# Altium PCB audio amplifier.PcbDoc
Units mil, origin at the board's own origin, x right, y up, seen from the top; angles counter-clockwise.
Board outline 3010.03 x 3155.03 mil, 2 copper layers (Top Layer, Bottom Layer); 26 components, 19 nets, 76 pads, 14 vias.
Unrouted connection lines stored in the file: 16.
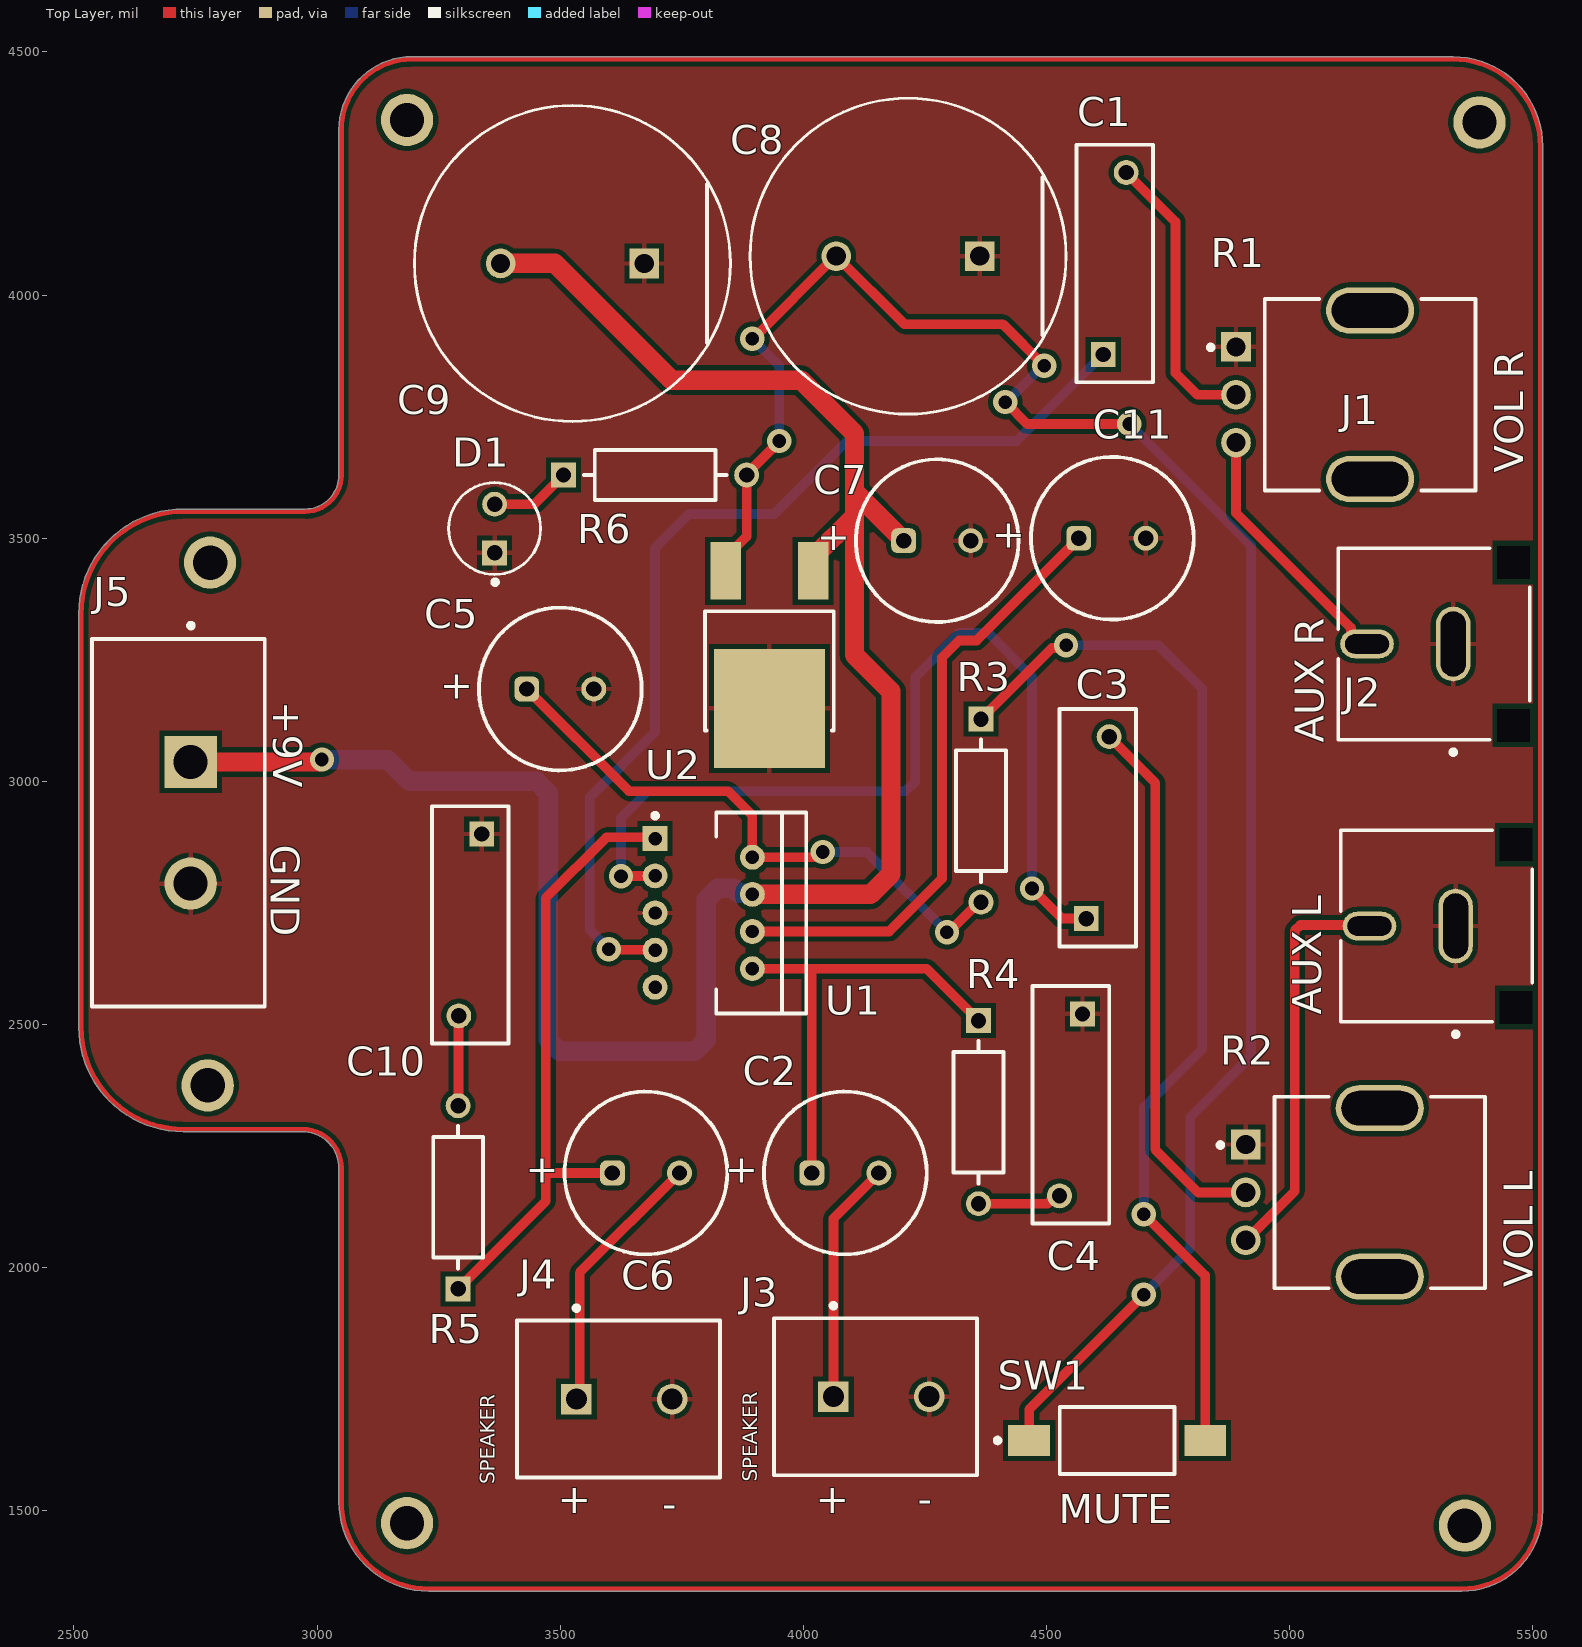
[diagram p0: Top Layer view]
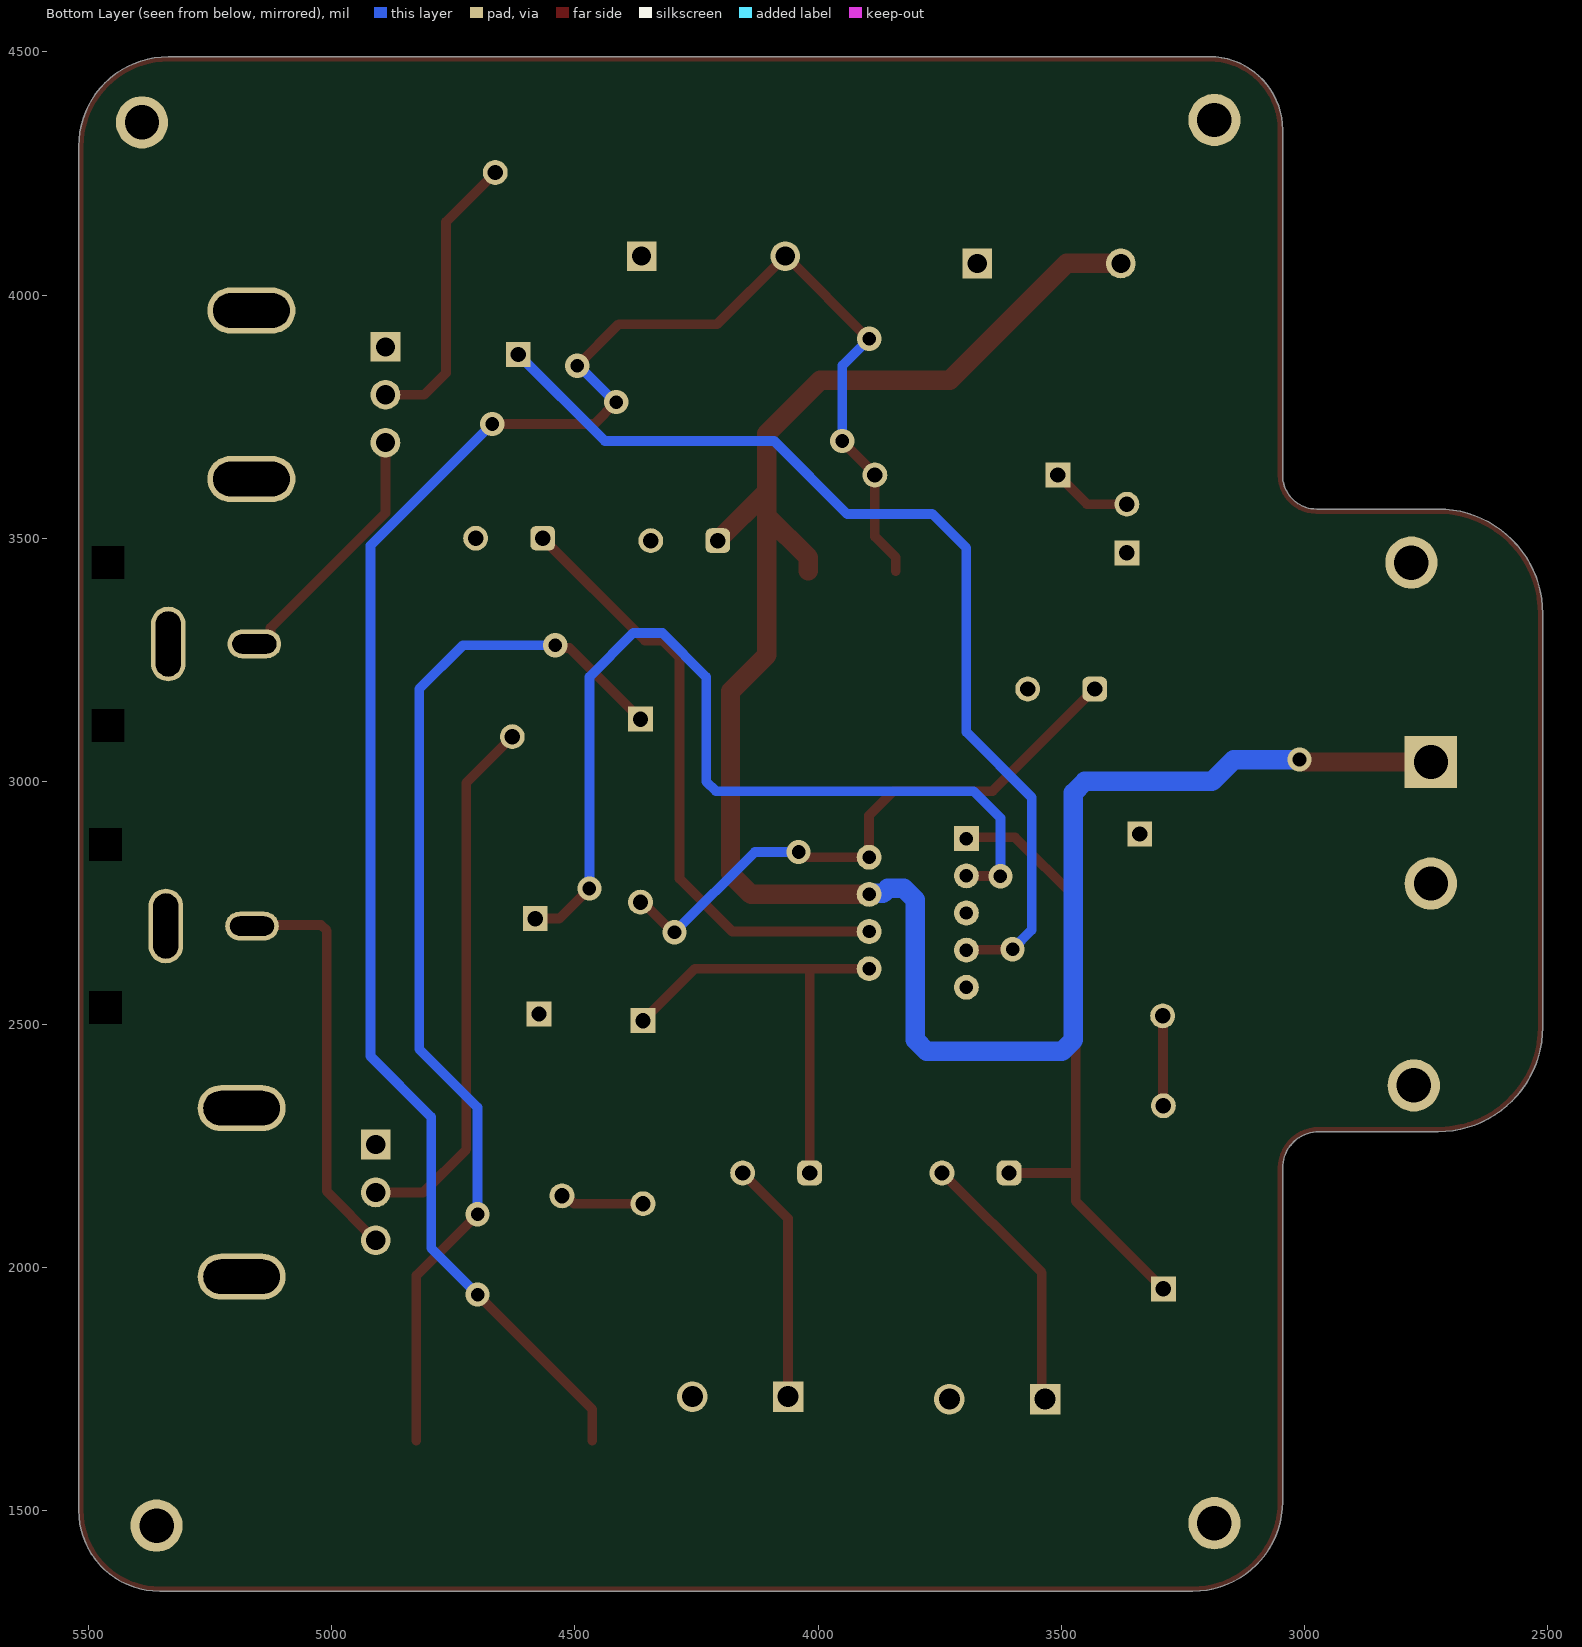
[diagram p1: Bottom Layer view, seen from below]
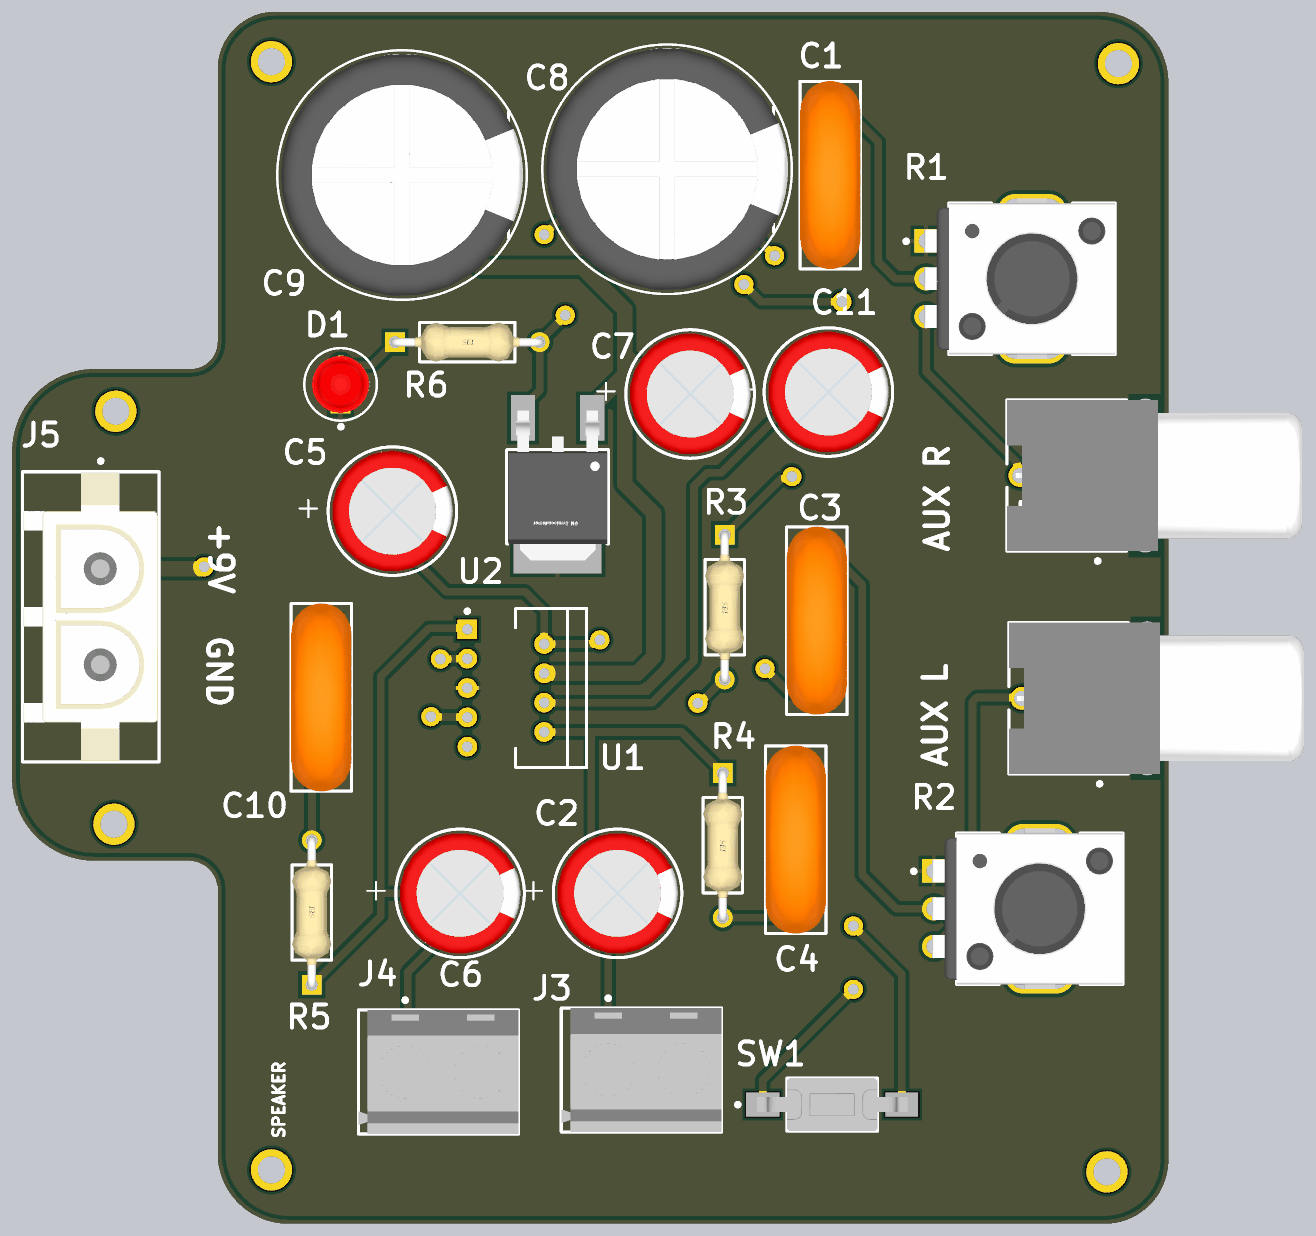
[diagram p2: 3D render of the assembled board from above, using the file's embedded part models]

## Layer stack, top to bottom
Top Solder: solder mask 0.4, Solder Resist, Dk 3.5
Top Layer: signal copper 1.4
Dielectric 1: dielectric 12.6, FR-4, Dk 4.8
Bottom Layer: signal copper 1.4
Bottom Solder: solder mask 0.4, Solder Resist, Dk 3.5

## Board outline
2725,2279.99 2970,2279.99 cw(c2970,2205) 3044.99,2205 3044.99,1519.16 ccw(c3229.16,1519.16) 3229.16,1334.98 5353.76,1334.98 ccw(c5353.76,1501.24) 5520.02,1501.24 5520.02,4305.84 ccw(c5335.84,4305.84) 5335.84,4490.02 3195,4490.02 ccw(c3195,4340) 3044.99,4340 3044.99,3630 cw(c2975,3630) 2975,3560.01 2725,3560.01 ccw(c2725,3345) 2509.99,3345 2509.99,2495 ccw(c2725,2495)

## Design rules (kind name [scope] priority, off if disabled: settings)
Clearance [All] p1: gap=10 ignorepadtopadclearanceinfootprint=FALSE
PolygonConnect [All] p1: connectstyle=Relief reliefconductorwidth=10 reliefentries=4 polygonreliefangle="90 Angle" airgapwidth=10
RoutingVias [All] p1: holewidth=28 width=50 viastyle="Through Hole" minholewidth=28 minwidth=50 maxholewidth=28 maxwidth=50
SolderMaskExpansion [All] p1: expansion=4 istentingtop=FALSE
SupplyNets "Schematic Supply Nets_1" [InNet('VCC')] p1: voltage=0.000
SupplyNets "Schematic Supply Nets" [InNet('GND')] p2: voltage=0.000
Width [All] p1: maxlimit=40 minlimit=10 preferedwidth=20 minimp=50.000000 maximp=50.000000 favimp=50.000000
30 further rules are at their usual default settings.

## Components (designator, comment, footprint, x,y, rotation, side; value= is the part's Value field where it differs from the comment)
C1 "0.1nF" FP-562R5GAS10-MFG 4640,4065 r90 top
C2 "100uF" WCAP-ATLL_D8H11.5 4086.1,2195 r180 top
C3 "0.1nF" FP-562R5GAS10-MFG 4605,2905 r90 top
C4 "0.1nF" FP-562R5GAS10-MFG 4550,2335 r270 top
C5 "10uF" WCAP-ATLL_D8H11.5 3500,3190 r180 top
C6 "100uF" WCAP-ATLL_D8H11.5 3676.1,2195 r180 top
C7 "100uF" WCAP-ATLL_D8H11.5 4275,3495 r180 top
C8 "1uF" FP-RAD-TH-D_16_0_5-L_25_2-MFG 4215,4080 r180 top
C9 "1uF" FP-RAD-TH-D_16_0_5-L_25_2-MFG 3525,4065 r180 top
C10 "0.1nF" FP-562R5GAS10-MFG 3315,2705 r270 top
C11 "100uF" WCAP-ATLL_D8H11.5 4635,3500 r180 top
D1 "LTL-1CHEE" FP-LTL-1CHEE-MFG 3365,3520 r90 top
J1 "RCJ-041" CUI-RCJ-041_V 5335.98,3282.68 r90 top
J2 "RCJ-041" CUI-RCJ-041_V 5340.98,2702.68 r90 top
J3 "282836-2" TECO-282836-2_V 4160,1735 r0 top
J4 "282836-2" TECO-282836-2_V 3631.57,1730 r0 top
J5 "350428-1" FP-350428-1-MFG 2715,2915 r270 top
R1 "PTV09A-4225F-B103" FP-PTV09A-4-MFG 5165,3795 r270 top
R2 "PTV09A-4225F-B103" FP-PTV09A-4-MFG 5185,2155 r270 top
R3 "12k" FP-CF14-MFG 4365,2940 r270 top
R4 "12k" FP-CF14-MFG 4360,2320 r270 top
R5 "12k" FP-CF14-MFG 3290,2145 r90 top
R6 "1k" FP-CF14-MFG 3695,3630 r0 top
SW1 "FSMSM" TECO-FSMSM-2_V 4645,1645 r0 top
U1 "LM4755T" TA09A 3795,2729.57 r270 top
U2 "MC78M05BDTG" FP-369C-MFG 3930,3260 r180 top

## Footprints (in the part's own frame and the unit in brackets; to place one, negate y for a bottom-side part, rotate by r counter-clockwise, add the part's x,y. Pads: shape width x height; smd on the part's side, far side on the other; paste and mask are expansions set on the pad)
CUI-RCJ-041_V [mm] "Jack, 2-Leads, Body 19.5x10mm"
  oval 3.9x1.8 hole 1.3 slot 3.4 at 0 deg: 1(0,0)
  oval 1.5x2.8 hole 1 slot 2.3 at 90 deg: 2(0,4.5)
  round 0 hole 1.7 square unplated: MH1(-4.25,-3.15) MH2(4.25,-3.15)
  silkscreen extent -5.77,-4 5,6, body extent -5,-13.5 5,6, height 11.51
FP-369C-MFG [mm]
  rect 1.6x3 smd paste+0 mask+0: 1(-2.285,-4.39) 3(2.285,-4.39)
  rect 5.8x6.2 smd paste+0 mask+0: 4(0,2.79)
  silkscreen extent -3.36,-2.28 3.36,3.94, body extent -3.62,-5.99 3.62,5.99, height 0.25
FP-562R5GAS10-MFG [mm]
  rect 1.3x1.3 hole 0.8 paste-2539.97 mask+0: 1(-4.75,0.6)
  round 1.3 hole 0.8 paste-2539.97 mask+0: 2(4.75,-0.6)
  silkscreen extent -6.2,-2 6.2,2, body extent -6.3,-2.1 6.3,2.1, height 0.25
FP-350428-1-MFG [mm]
  rect 2.73x2.73 hole 1.78 paste-2539.97 mask+0: 1(-3.175,0.635)
  round 2.73 hole 1.78 paste-2539.97 mask+0: 2(3.175,0.635)
  silkscreen extent -10.42,-4.51 9.59,4.51, body extent -9.69,-4.61 9.69,4.61, height 0.25
FP-CF14-MFG [mm]
  rect 1.3x1.3 hole 0.8 paste-2539.97 mask+0: 1(-4.78,0)
  round 1.3 hole 0.8 paste-2539.97 mask+0: 2(4.78,0)
  silkscreen extent -3.73,-1.3 3.73,1.3, body extent -5.53,-1.4 5.53,1.4, height 0.25
FP-LTL-1CHEE-MFG [mm]
  rect 1.3x1.3 hole 0.8 paste-2539.97 mask+0: 1(-1.27,0)
  round 1.3 hole 0.8 paste-2539.97 mask+0: 2(1.27,0)
  silkscreen extent -2.92,-2.4 2.4,2.4, body extent -2.15,-2.15 2.15,2.15, height 0.25
FP-PTV09A-4-MFG [mm]
  rect 1.55x1.55 hole 1 paste-2539.97 mask+0: 1(-2.5,-7)
  round 1.55 hole 1 paste-2539.97 mask+0: 2(0,-7) 3(2.5,-7)
  rrect100% 2.4x4.6 hole 4 slot 1.8 at 0 deg paste-2539.97 mask+0: 4(-4.4,0) 5(4.4,0)
  silkscreen extent -5,-8.45 5,5.5, body extent -5.8,-7.88 5.8,5.6, height 0.25
FP-RAD-TH-D_16_0_5-L_25_2-MFG [mm]
  rect 1.55x1.55 hole 1 paste-2539.97 mask+0: 1(-3.75,0)
  round 1.55 hole 1 paste-2539.97 mask+0: 2(3.75,0)
  silkscreen extent -8.25,-8.25 8.25,8.25, body extent -8.35,-8.35 8.35,8.35, height 0.25
TA09A [mm] "TO, Thru-Hole, Vertical, Heatsink Mounted; 9 Bent Staggered Leads; Pitch 0.97 mm"
  rect 1.3x1.3 hole 0.7: 1(-3.88,-2.54)
  round 1.3 hole 0.7: 2(-2.91,2.54) 3(-1.94,-2.54) 4(-0.97,2.54) 5(0,-2.54) 6(0.97,2.54) 7(1.94,-2.54) 8(2.91,2.54) 9(3.88,-2.54)
  silkscreen extent -5.25,-2.66 5.25,5.35, body extent -5.25,0.65 5.25,5.35, height 20.9
TECO-282836-2_V [mm] "Female Header, Pitch 5mm, 1 x 2 Position, Height 10mm"
  rect 1.6x1.6 hole 1.1: 1(-2.5,0)
  round 1.6 hole 1.1: 2(2.5,0)
  silkscreen extent -5.6,-4.1 5,4.87, body extent -5.6,-4.1 5,4.1, height 10
TECO-FSMSM-2_V [mm] "SMD, 2-Leads, Body 6x3.5mm, Pitch 9.19mm"
  rect 2.2x1.6 smd: 1(-4.595,0)
  rect 2.18x1.6 smd: 2(4.595,0)
  silkscreen extent -6.37,-1.75 3,1.75, body extent -4.98,-1.75 4.98,1.75, height 4.4
WCAP-ATLL_D8H11.5 [mm] "Aluminum Electrolytic Capacitors, 8x11.5mm"
  rrect50% 1.3x1.3 hole 0.8: 1(1.75,0)
  round 1.3 hole 0.8: 2(-1.75,0)
  silkscreen extent -4.25,-4.25 4.25,4.25, body extent -3.99,-4 4,4, height 11.81

## Part data
C1 C3 C4 C10: library part CMP-02417-000061-1, "CAP CER 10000PF 1KV Z5U RADIAL", Capacitance=10nF, Case/Package=Radial, Dielectric=Z5U, Max Operating Temperature=105°C, Min Operating Temperature=-55°C, Package Quantity=250, Resistor Type=Ceramic, Tolerance=20%, Voltage=1kV, Application(s)="GENERAL PURPOSE", Construction=RADIAL, Contact Plating=Tin, Depth=4mm, Diameter=12.4mm, Dissipation Factor=2.5%, Height=0.25inch, Height - Seated (Max)=0.613inch, Lead Diameter=0.64mm, Lead Free="Lead Free", Lead Length=29mm, Lead Pitch=9.5mm, Lead/Base Style=Straight, Length=2inch, Mount="Through Hole", Packaging=Bulk, Radiation Hardening=No, RoHS Compliant=Yes, Series="Cera-Mite 562R", Termination=Radial, Voltage Rating=1kV, Voltage Rating (DC)=1kV, Weight=0.01lb, Width=4mm
C2 C5 C6 C7 C11: library part CMP-03913-53914461-1, "860160574013 WCAP-ATLL Aluminum Electrolytic Capacitors", Capacitance=100µF, Case/Package=Radial, Leakage Current=35µA, Max Operating Temperature=105°C, Min Operating Temperature=-55°C, Ripple Current=414mA, Tolerance=20%, Voltage Rating=35V, Diameter=8mm, Height=11.5mm, Lead Pitch=3.5mm, Length=11.5mm, Life (Hours)=7000hours, Material=Aluminium, NexarPartId=53914461, Pitch=3.5mm, REACH SVHC=Unknown, RoHS=Non-Compliant, Voltage Rating (DC)=35V
C8 C9: library part CMP-05427-001116-1, "Aluminum Electrolytic Capacitors (Radial Lead Type) 47uF ±20% 400V", Capacitance=47uF, Case/Package=Radial, Dielectric Material=Aluminium, Leakage Current=1.138mA, Max Operating Temperature=105°C, Min Operating Temperature=-25°C, Package Quantity=100, Ripple Current=1.18A, Tolerance=20%, Voltage=400V, Construction=RADIAL, Diameter=16mm, Dissipation Factor=0.24%, Height=25mm, Height - Seated (Max)=0.984inch, Lead Diameter=0.8mm, Lead Free="Lead Free", Lead Pitch=7.5mm, Length=25mm, Life (Hours)=10000Hour, Mount="Through Hole", Number of Pins=2, Packaging=Bulk, Radiation Hardening=No, REACH SVHC="No SVHC", Ripple Current (AC)=1.18A, RoHS Compliant=Yes, Series=EE, Termination=Radial, Voltage Rating=400V, Voltage Rating (DC)=400V
D1: library part CMP-22017-000040-1, "LED RED CLEAR T/H", Case/Package=T, Color=Red, Forward Current=30mA, Forward Voltage=2V, Max Operating Temperature=100°C, Max Power Dissipation=100mW, Min Operating Temperature=-55°C, Package Quantity=1000, Reverse Voltage=5V, Test Current=10mA, Depth=3.8mm, Diameter=3.1mm, Dominant Wavelength=625nm, Height=5.2mm, Illumination Color=Red, Lead Free="Lead Free", Length=3.8mm, Lens Color=Red, Lens Style=Dome, Lens Transparency=Clear, Luminous Intensity=19mcd, Mount="Through Hole", Number of Elements=1, Number of LEDs=1, Number of Pins=2, Packaging=Bulk, Power Dissipation=100mW, Radiation Hardening=No, RoHS Compliant=Yes, Series=-, Viewing Angle=45°, Wavelength=635nm, Width=3.8mm
J1 J2: library part CMP-1692-00002-1, "Female RCJ Jack, 2 Position, Height 11.724 mm, Tail Length 4 mm, RoHS, Bulk", Case\Package=Metal, Colour=Black, Current Rating="500 mA", Max Operating Temperature="85 degC", Min Operating Temperature="-55 degC", Package Quantity=400, Voltage Rating="40 V", ComponentLink1Description="Manufacturer URL", ComponentLink1URL=http://www.cui.com/, ComponentLink2Description=Datasheet, ComponentLink2URL=http://www.cui.com/product/resource/rcj-04x.pdf, Connector Type=HDMI, Contact Material=Copper, Contact Plating=Gold, DatasheetVersion="Rev. B, 02/2012", Gender=Female, Height="6.1 mm", Lead Pitch="0.5 mm", Length="16.2 mm", Mount="Surface Mount", PackageDescription="Female RCJ Jack, 2 Position, Height 11.724 mm, Tail Length 4 mm", PackageReference=RCJ-041, Packaging="Tape and Reel", Pins=19, REACH SVHC="No SVHC", RoHSCompliant=true
J3 J4: library part CMP-1684-00017-1, "Female Header, Pitch 5 mm, 1 x 2 Position, Height 10 mm, Tail Length 3.5 mm, Rohs, Bulk", Color=Green, Current=13.5A, Manufacturer="TE Connectivity", Package Description="Female Header, Pitch 5 mm, 1 x 2 Position, Height 10 mm, Tail Length 3.5 mm", Package Reference=THD, Standard Package=300, Voltage=300V, 3D Model=282836-2.pdf, Category=Connectors,Interconnects, Clamp Material - Plating=Brass-NickelPlated, Contact Material - Plating=Brass-TinPlated, Datasheet URL=http://www.te.com.cn/commerce/DocumentDelivery/DDEController?Action=showdoc&DocId=Catalog+Section%7F1308389_EUROSTYLE_TERMINAL_BLOCKS%7F0607%7Fpdf%7FEnglish%7FENG_CS_1308389_EUROSTYLE_TERMINAL_BLOCKS_0607.pdf%7F282836-2, Dynamic Catalog=BuchananSeries, Family=TerminalBlocks-WiretoBoard, Featured Product=EurostyleTerminalBlockConnectors, Features=Interlocking(Side), Housing Material=Polyamide(PA66),Nylon6/6, Manufacturer URL=http://www.te.com, Mating Orientation=HorizontalwithBoard, Mounting Type=ThroughHole, Number of Levels=1, Other Names="5ULV-02B / A98076", Packaging=Bulk, Pitch="0.197\"(5.00mm)", Positions Per Level=2, Product Training Modules=Wire-to-BoardEurostyleTerminalBlocks, RoHS Information=282836-2StatementofCompliance, Screw Material - Plating=Brass-NickelPlated, Screw Thread=M3, Series=Buchanan, Torque - Screw=0.68Nm(6Lb-In), Wire Gauge=16-30AWG, Wire Termination=Screw-RisingCageClamp
J5: library part CMP-03369-000080-1, "CONN HEADER VERT 2POS 6.35MM", Current Rating=12A, Manufacturer="TE Connectivity", Temperature="-40°C to +105°C", Temperature Range High=+105°C, Temperature Range Low=-40°C, Voltage Rating=600V, Automotive=No, Category=Conn, ComponentLink2Description=Datasheet, ComponentLink2URL=https://www.te.com/commerce/DocumentDelivery/DDEController?Action=showdoc&DocId=Customer+Drawing%7F350428%7FY2%7Fpdf%7FEnglish%7FENG_CD_350428_Y2.pdf%7F350428-1, Conn Gender=Male, Conn Orientation=Vertical, Contact Material=Gold,Nickel, Device Class L1=Connectors, Device Class L2="Headers and Wire Housings", Device Class L3=unset, Digikey Description="CONN HEADER VERT 2POS 6.35MM", Height=14.99mm, Lead Free=Yes, Manufacturer Part Number=350428-1, Mouser Description="Connector, Soft Shell; Universal MATE-N-LOK; 2; Nylon; Natural; 19 A; 600 VAC", Number Of Contacts=2, Number Of Rows=1, Octopart=https://octopart.com/350428-1-te+connectivity-46505355, Package=350428-1, Pitch=6.35mm, RoHS=TRUE, Standoff Height=0.63mm
R1 R2: library part CMP-07234-000052-1, "POT 10K OHM 1/20W CARBON LINEAR", Max Operating Temperature=50°C, Max Power Dissipation=50mW, Min Operating Temperature=-10°C, Package Quantity=100, Resistance=10kR, Resistance Tolerance=20%, Resistor Type=Carbon, Actuator Diameter=0.236inch, Actuator Length=0.984inch, Depth=12.5mm, Height=12.5mm, Hole Diameter=9.1mm, Length=11.4mm, Military Standard=Not, Mount="Through Hole", Number of Gangs=1, Number of Turns=1, Packaging=Bulk, Power Rating=50mW, Radiation Hardening=No, REACH SVHC="No SVHC", RoHS Compliant=Yes, Series="Pro Audio PTV09", Taper=Linear, Technology="CARBON FILM", Termination=PCB, Tolerance=20%, Type=Potentiometer
R3 R4 R5 R6: library part CMP-26528-000003-1, "RES 7.5K OHM 1/4W 5% AXIAL", Case/Package=Axial, Max Operating Temperature=155°C, Max Power Dissipation=250mW, Min Operating Temperature=-55°C, Resistance=7.5kR, Resistor Type="Carbon Film", Temperature Coefficient=-400ppm/°C, Tolerance=5%, Contact Plating=Tin, Diameter=2.3mm, Features="Flame Retardant Coating", Lead Free="Lead Free", Length=0.256inch, Mount="Through Hole", Number of Terminations=2, Packaging="Tape and Reel", Power Rating=250mW, Radiation Hardening=No, RoHS Compliant=Yes, Series=CF
SW1: library part CMP-2000-07511-1, "FSMSM Push Button Switch, 50 mA, -35 to 85 degC, 2-Pin SMD, RoHS, Bulk", Case\/Package=SMD/SMT, Contact Current Rating=50mA, Contact Resistance=100mOhm, Manufacturer="TE Connectivity", Max Operating Temperature=85degC, Max Voltage Rating (DC)=12V, Min Operating Temperature=-35degC, Operating Force=180gf, Package Description="2-Pin Surface Mount Device, Body 6 x 3.5 mm, Pitch 9.19 mm", Package Quantity=1000, Voltage Rating (DC)=24V, Actuator Length=1.07mm, Actuator Material=Polyamide, Contact Material=Brass, Contact Plating=Silver, Current Rating=50mA, Datasheet URL=http://www.te.com/commerce/DocumentDelivery/DDEController?Action=showdoc&DocId=Customer+Drawing%7F1437566-3%7FC2%7Fpdf%7FEnglish%7FENG_CD_1437566-3_C2_1437566_3_1_c.dwg.pdf%7F1437566-3, Datasheet Version="Rev. C2, 08/2014", Electrical Life=20000Cycles, ELV=Compliant, Illumination Type=Illuminated, Lead Free=LeadFree, Manufacturer URL=http://www.te.com/, Mechanical Life=20000Cycles, Mount=SurfaceMount, Mounting Technology=SurfaceMount, Orientation=Straight, Package Reference=FSMSM, Packaging=LoosePiece, REACH SVHC=Unknown, RoHSCompliant=true, Switch Travel=0.25mm, Termination=GullWing, Throw Configuration=SPST
U1: library part CMP-0057-00640-1, "Stereo 11W Audio Power Amplifier with Mute, 9-pin TO-220", Manufacturer="National Semiconductor", PackageTopMarking=NSUZXYTTE#*LM4755T, PowerWise=N, CompType="Audio IC", DatasheetVersion=May-2008, PackageDescription="TO-220, Molded, 9 Lead, Staggered", PackageReference=TA09A, PackageVersion="revC, Jul-1999", PinCount=9, RoHS=N
U2: library part CMP-07128-000029-1, "IC REG LINEAR 5V 500MA DPAK", Dropout Voltage=2V, Manufacturer="ON Semiconductor", Max Junction Temp=+125°C, Max Supply Voltage=35V, Min Supply Voltage=7V, Nominal Supply Current=3.2mA, Output Current=500mA, Output Voltage=5V, Package=369C, Temperature="-40°C to +125°C", Temperature Range Low=-40°C, Accuracy Percentage=4%, Automotive=No, Category=IC, ComponentLink2Description=Datasheet, ComponentLink2URL=https://www.onsemi.cn/PowerSolutions/document/MC78M00-D.PDF, Device Class L1="Integrated Circuits (ICs)", Device Class L2="Power Management ICs", Device Class L3="Voltage Regulators - Linear", Digikey Description="IC REG LINEAR 5V 500MA DPAK", Footprint Url=https://www.onsemi.com/pub/Collateral/369C.PDF, Height=2.51mm, Lead Free=Yes, Manufacturer Part Number=MC78M05BDTG, Mouser Description="Linear Voltage Regulators 5V 500mA Positive", Number Of Outputs=1, Octopart=https://octopart.com/mc78m05bdtg-on+semiconductor-1009693, Output Type=Fixed, RoHS=TRUE, Standoff Height=0mm, Temperature Range High=+125°C

## Free pads (board coordinates)
  round 107.48 hole 70.71: 8(2775,2375) 9(2780,3450) 10(3185,4360) 11(3185,1475) 12(5360,1470) 13(5390,4355)

## Via types
v1: diameter 50, hole 28, Top Layer to Bottom Layer, 14 vias

## Nets (pads, with @x,y where several pads share a name; then routed paths per layer and width w, separated by ;. In a path a pad name is that pad's centre, name@x,y a point inside that pad or via, vN(x,y) a via of type N, cw(c..) or ccw(c..) an arc to the next point about the centre after c; other vN are vias at no path point)
GND: C4.1 C5.2 C7.2 C8.1 C9.1 C10.1 C11.2 D1.1 J1.1 J2.1 J3.2 J4.2 J5.2 R1.1 R2.1 U1.5 U2.4
NetC1_1: C1.1 U1.7 | length 2078.8
  Top Layer w20: v1(3600,2655) 3600.91,2654.09 3694.09,2654.09 U1.7
  Bottom Layer w20: v1(3600,2655) 3560.78,2694.22 3560.78,2967.5 3695,3101.72 3695,3480 3765,3550 3940,3550 4090,3700 4438.39,3700 C1.1
NetC1_2: C1.2 R1.2 | length 597
  Top Layer w20: C1.2 4765,4150.63 4765,3840 4810,3795 R1.2
NetC2_1: C2.1 R4.1 U1.8 | length 930.2
  Top Layer w20: U1.8 4015,2615 ; C2.1 4017.2,2612.8 4015,2615 ; R4.1 4253.19,2615 4015,2615
NetC2_2: C2.2 J3.1 | length 498.7
  Top Layer w20: J3.1 4061.57,2101.57 C2.2
NetC3_1: C3.1 U1.3 | length 1928.1
  Top Layer w20: v1(3625,2805) 3625.47,2805.47 3694.53,2805.47 U1.3 ; v1(4470,2780) 4532.01,2717.99 C3.1
  Bottom Layer w20: v1(3625,2805) 3625,2925 3680,2980 4210,2980 4230,3000 4230,3215 4320,3305 4380,3305 4470,3215 v1(4470,2780)
NetC3_2: C3.2 R2.2 | length 1110.5
  Top Layer w20: C3.2 4723.15,2997.48 4723.15,2243.56 4811.72,2155 R2.2
NetC4_2: C4.2 R4.2 | length 173.1
  Top Layer w20: R4.2 4501.76,2131.81 4517.94,2147.99 C4.2
NetC5_1: C5.1 R3.2 U1.2 | length 1225.9
  Top Layer w20: C5.1 3641.1,2980 3845,2980 3895,2930 U1.2 4021.02,2844.13 4031.88,2855 v1(4040,2855) ; v1(4295,2690) 4299.09,2690 4360.91,2751.81 R3.2
  Bottom Layer w20: v1(4040,2855) 4130,2855 v1(4295,2690)
NetC6_1: C6.1 R5.1 U1.1 | length 1292.8
  Top Layer w20: R5.1 3470,2136.81 3470,2195 ; C6.1 3470,2195 ; U1.1 3692.32,2885 3595,2885 3470,2760 3470,2195
NetC6_2: C6.2 J4.1 | length 552.8
  Top Layer w20: J4.1 3540,1736.85 3540,1990 C6.2
NetC8_2: C8.2 R6.2 SW1.1 U2.3 | length 4076.2
  Top Layer w20: U2.3 3840.04,3460.39 3883.19,3503.54 R6.2 3883.19,3631.59 3950,3698.41 v1(3950,3700) ; v1(3895,3910) 3896.18,3910 4066.18,4080 C8.2 4207.36,3940 4410,3940 v1(4495,3855) ; v1(4415,3780) 4460,3735 v1(4670,3735) ; SW1.1 4464.09,1709.09 v1(4700,1945)
  Bottom Layer w20: v1(3895,3910) 3950,3855 v1(3950,3700) ; v1(4415,3780) 4417.5,3780 4492.5,3855 v1(4495,3855) ; v1(4670,3735) 4920,3485 4920,2435 4795.37,2310.37 4795.37,2040.37 v1(4700,1945)
NetC10_2: C10.2 R5.2 | length 185.4
  Top Layer w20: R5.2 3290.69,2333.88 3290.69,2517.3 C10.2
NetC11_1: C11.1 U1.6 | length 1272.6
  Top Layer w20: U1.6 4176.38,2691.38 4285,2800 4285,3255 4320,3290 4356.1,3290 C11.1
NetD1_2: D1.2 R6.1 | length 166.7
  Top Layer w20: D1.2 3446.81,3570 R6.1
NetJ1_2: J1.2 R1.3 | length 534.3
  Top Layer w20: R1.3 4889.41,3552.09 5125.76,3315.74 5125.76,3300.72 5143.8,3282.68 J1.2
NetJ2_2: J2.2 R2.3 | length 838
  Top Layer w20: R2.3 5010,2157.17 5010,2693.28 5021.72,2705 5161.5,2705 J2.2
NetR3_1: R3.1 SW1.2 | length 2202
  Top Layer w20: R3.1 4511.07,3274.26 4534.26,3274.26 v1(4540,3280) ; v1(4700,2110) 4825.91,1984.09 SW1.2
  Bottom Layer w20: v1(4540,3280) 4730,3280 4820,3190 4820,2450 4700,2330 v1(4700,2110)
VCC: C7.1 C9.2 J5.1 U1.4 U2.1 | length 4417.7
  Top Layer w40: J5.1 3002.29,3040 3007.29,3045 v1(3010,3045) ; C9.2 3489.03,4065 3729.03,3825 3995,3825 4105,3715 4105,3596.1 ; U1.4 4137.76,2767.76 4180,2810 4180,3185 4105,3260 4105,3545 ; U2.1 4019.96,3460.39 4104.57,3545 4105,3545 ; C7.1 4105,3596.1 ; 4105,3545 4105,3596.1
  Bottom Layer w40: v1(3010,3045) 3145,3045 3190,3000 3451.57,3000 3475,2976.57 3475,2468.43 3498.43,2445 3776.57,2445 3800,2468.43 3800,2756.57 3823.43,2780 3856.57,2780 3866.67,2769.9 3892.86,2769.9 U1.4
pads on no net: J1.MH1 J1.MH2 J2.MH1 J2.MH2 R1.4 R1.5 R2.4 R2.5 U1.9
copper on no net: | length 11768
  Top Layer w10: 3050,2195 3050,2205 ; 3050,2205 ccw(c2970,2205) 2970,2285 2725,2285 cw(c2725,2495) 2515,2495 2515,3345 cw(c2725,3345) 2725,3555 2975,3555 ccw(c2975,3630) 3050,3630 3050,4340 cw(c3195,4340) 3195,4485 5335.84,4485 cw(c5335.84,4305.84) 5515,4305.84 5515,1501.24 cw(c5353.76,1501.24) 5353.76,1340 3229.16,1340 cw(c3229.16,1519.16) 3050,1519.16 3050,2205

## Polygon pours and split planes (outlines as drawn)
GND on Top Layer "GND_L01_P000" (solid, pour order 0): 2725,2279.99 2970,2279.99 cw(c2970,2205) 3044.99,2205 3044.99,1519.16 ccw(c3229.16,1519.16) 3229.16,1334.98 5353.76,1334.98 ccw(c5353.76,1501.24) 5520.02,1501.24 5520.02,4305.84 ccw(c5335.84,4305.84) 5335.84,4490.02 3195,4490.02 ccw(c3195,4340) 3044.99,4340 3044.99,3630 cw(c2975,3630) 2975,3560.01 2725,3560.01 ccw(c2725,3345) 2509.99,3345 2509.99,2495 ccw(c2725,2495)

## Silkscreen, mask and mechanical layers (free items; w line width, h text height)
Top Overlay:
  text "VOL R" at 5480,3635 h60 r90
  text "+9V" at 2910,3165 h60 r270
  text "AUX R" at 5070,3080 h60 r90
  text "GND" at 2905,2870 h60 r270
  text "AUX L" at 5065,2520 h60 r90
  text "VOL L" at 5500,1960 h60 r90
  text "SPEAKER" at 3905,1560 h30 r90
  text "SPEAKER" at 3365,1555 h30 r90
  text "+" at 3495,1495 h60
  text "+" at 4025,1495 h60
  text "-" at 4235,1495 h60
  text "-" at 3710,1485 h60
  text "MUTE" at 4525,1475 h60

## Text inside footprints (layer, text, board x,y; h text height)
C2: Top Overlay "+" at 3906.97,2224.53 h59.06 r180
C5: Top Overlay "+" at 3320.87,3219.53 h59.06 r180
C6: Top Overlay "+" at 3496.97,2224.53 h59.06 r180
C7: Top Overlay "+" at 4095.87,3524.53 h59.06 r180
C11: Top Overlay "+" at 4455.87,3529.53 h59.06 r180
J1: Mechanical 1 "PCB Edge" at 5485.59,3518.9 h23.62 r90
J2: Mechanical 1 "PCB Edge" at 5490.59,2938.9 h23.62 r90